# EAGLE board RJ12_UNO_shield (EAGLE 7.4.0)
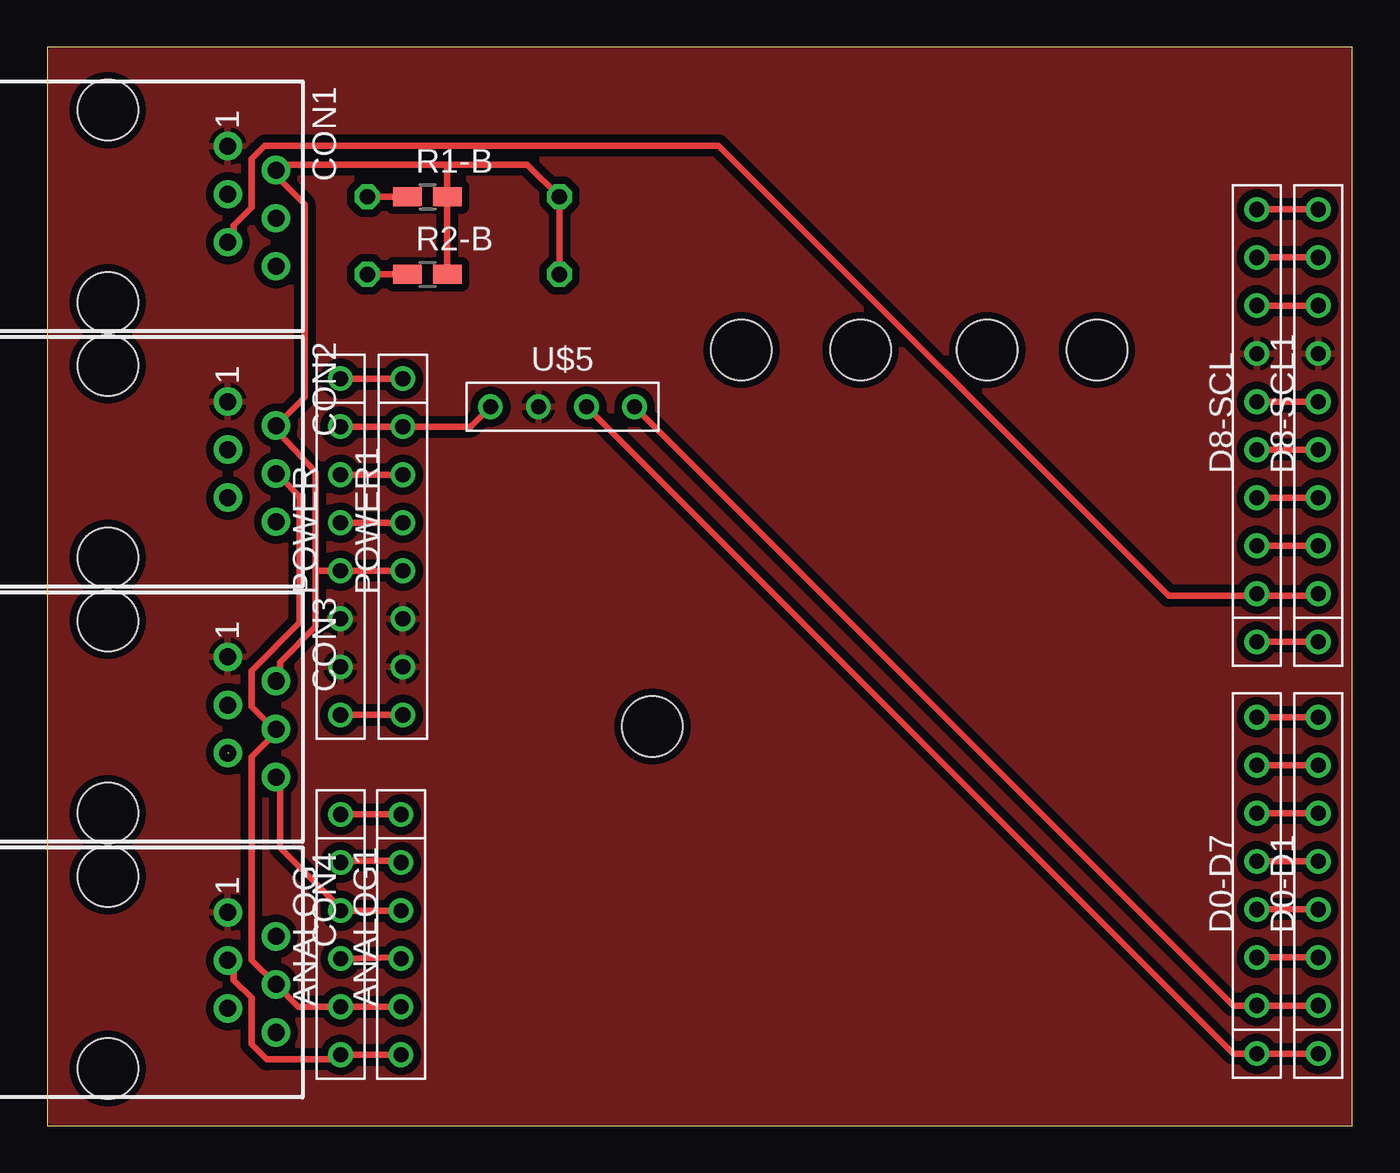
[diagram p0: board, top side]
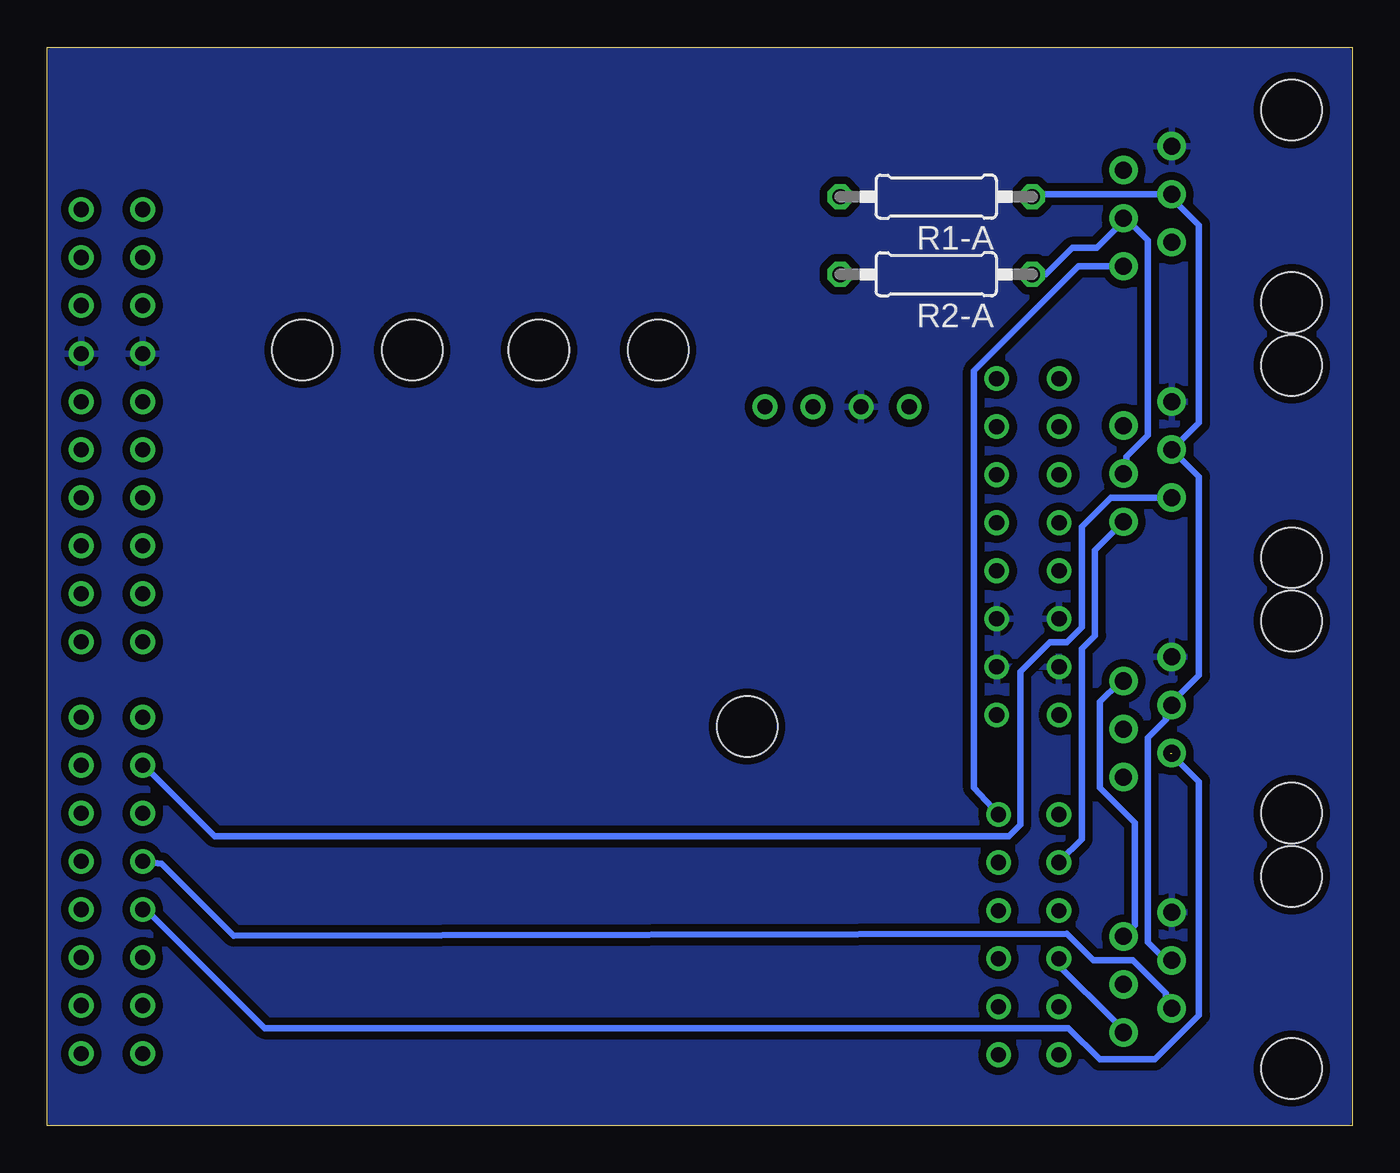
[diagram p1: board, bottom side, seen from below]

Size 69 x 57 mm. Coordinates in mm from the lower left corner, seen from the top.
Outline: 0,0 69,0 69,57 0,57 0,0
Copper layers (1*16): Top 0.035mm / dielectric 1.5mm / Bottom 0.035mm
Design rules "default *": minimum track width 10mil, minimum drill 24mil, track to track 12mil, track to pad 12mil, pad to pad 12mil, via to via 12mil, smd to smd 12mil, copper to edge 0mil, drill to drill 8mil, minimum pad ring 10mil, minimum via ring 8mil, stop-mask expansion 4mil, vias tented up to drill 0mil, thermal gap 10mil
Holes 3.2 mm at 32,21.1 55.5,41 49.7,41 43,41 36.7,41

## Footprints (pad centres in the part's own frame; a part is rotated, then mirrored left to right if it is on the bottom)
ANALOG = drill 0.8: A0 0,6.35; A1 0,3.81; A2 0,1.27; A3 0,-1.27; A4 0,-3.81; A5 0,-6.35
RJ12 = drill 0.9 pad 1.5: 1 -3.175,6.35; 2 -1.905,8.89; 3 -0.635,6.35; 4 0.635,8.89; 5 1.905,6.35; 6 3.175,8.89 | hole 3.2: -5.08,0; 5.08,0
DIGITAL0-7 = drill 0.8: D0 0,-8.89; D1 0,-6.35; D2 0,-3.81; D3 0,-1.27; D4 0,1.27; D5 0,3.81; D6 0,6.35; D7 0,8.89
DIGITAL8-SCL = drill 0.8: AREF 0,6.35; D8 0,-11.43; D9 0,-8.89; D10 0,-6.35; D11 0,-3.81; D12 0,-1.27; D13 0,1.27; GND 0,3.81; SCL 0,11.43; SDA 0,8.89
POWER = drill 0.8: 3V3 0,1.27; 5V(1) 0,6.35; 5V(2) 0,-1.27; GBD(2) 0,-6.35; GND(1) 0,-3.81; NC 0,8.89; RES 0,3.81; VIN 0,-8.89
0207/10 = drill 0.813 octagon: 1 -5.08,0; 2 5.08,0
R0805W = smd 1.5 x 1: 1 -1.052,0; 2 1.052,0
BLUETOOTH = drill 0.8: 5V 0,-3.81; GND 0,-1.27; RX 0,3.81; TX 0,1.27

## Placement (x,y rotation side)
ANALOG  ANALOG  [ANALOG]  15.51,10.1 0 top
ANALOG1  ANALOG  [ANALOG]  18.7,10.1 0 top
CON1  RJ12  [RJ12]  3.2,48.6 270 top
CON2  RJ12  [RJ12]  3.2,35.1 270 top
CON3  RJ12  [RJ12]  3.2,21.6 270 top
CON4  RJ12  [RJ12]  3.2,8.1 270 top
D0-D1  DIGITAL0-7  [DIGITAL0-7]  67.2,12.7 0 top
D0-D7  DIGITAL0-7  [DIGITAL0-7]  63.96,12.7 0 top
D8-SCL  DIGITAL8-SCL  [DIGITAL8-SCL]  63.96,37 0 top
D8-SCL1  DIGITAL8-SCL  [DIGITAL8-SCL]  67.2,37 0 top
POWER  POWER  [POWER]  15.5,30.6 0 top
POWER1  POWER  [POWER]  18.8,30.6 0 top
R1-A  [0207/10]  22,49.1 180 bottom
R1-B  [R0805W]  20.1,49.1 0 top
R2-A  [0207/10]  22,45 180 bottom
R2-B  [R0805W]  20.1,45 0 top
U$5  BLUETOOTH  [BLUETOOTH]  27.24,38 270 top

## Library data of the parts
ANALOG ANALOG1 CON1-CON4 D0-D1 D0-D7 D8-SCL D8-SCL1 POWER POWER1 U$5 = AtoG
R1-A R1-B R2-A R2-B = resistor

## Nets
GND: CON1.1 CON2.1 CON3.1 CON4.1 D8-SCL1.GND D8-SCL.GND POWER1.GBD(2) POWER1.GND(1) POWER.GBD(2) POWER.GND(1) U$5.GND
N$1: ANALOG1.A5 ANALOG.A5 CON1.3 CON2.3 CON3.3 CON4.3 R1-A.1 R1-B.1
N$2: ANALOG1.A4 ANALOG.A4 CON1.4 CON2.4 CON3.4 CON4.4 R2-A.1 R2-B.1
N$3: CON2.5 D0-D1.D6 D0-D7.D6
N$4: ANALOG1.A2 ANALOG.A2 CON3.6
N$5: ANALOG1.A1 ANALOG.A1 CON2.6
N$6: ANALOG1.A0 ANALOG.A0 CON1.6
N$7: POWER1.NC POWER.NC
N$8: POWER1.RES POWER.RES
N$9: POWER1.3V3 POWER.3V3
N$11: POWER1.VIN POWER.VIN
N$12: D8-SCL1.SCL D8-SCL.SCL
N$13: POWER1.5V(1) POWER.5V(1) U$5.5V
N$14: D8-SCL1.SDA D8-SCL.SDA
N$15: D0-D1.D0 D0-D7.D0 U$5.TX
N$16: D0-D1.D1 D0-D7.D1 U$5.RX
N$17: D8-SCL1.AREF D8-SCL.AREF
N$18: CON4.5 D0-D1.D4 D0-D7.D4
N$19: D8-SCL1.D13 D8-SCL.D13
N$20: CON3.5 D0-D1.D3 D0-D7.D3
N$22: D8-SCL1.D12 D8-SCL.D12
N$23: D8-SCL1.D11 D8-SCL.D11
N$24: CON1.5 D8-SCL1.D9 D8-SCL.D9
N$25: D8-SCL1.D10 D8-SCL.D10
N$26: D8-SCL1.D8 D8-SCL.D8
N$27: D0-D1.D7 D0-D7.D7
N$29: D0-D1.D2 D0-D7.D2
N$30: ANALOG1.A3 ANALOG.A3 CON4.6
N$31: CON1.2 CON2.2 CON3.2 CON4.2 POWER1.5V(2) POWER.5V(2) R1-A.2 R1-B.2 R2-A.2 R2-B.2
N$33: D0-D1.D5 D0-D7.D5

## Tracks (layer width: path | path; a pad name or v marks a point on that pad's centre or on a via)
GND
  pour Top (isolate 0.406): 0.2,56.8 0.2,0.2 68.8,0.2 68.8,56.8
  pour Bottom (isolate 0.406): 0.2,56.8 0.2,0.2 68.8,0.2 68.8,56.8
  pour Top: 1.6,10.7 1.6,5.3 7.3,5.2 7.3,10.6
  pour Top: 1.2,24.4 1.2,19 6.9,18.9 6.9,24.3
  pour Top: 1.4,37.8 1.4,32.4 7.1,32.3 7.1,37.7
  pour Top: 1.3,51.4 1.3,46 7,45.9 7,51.3
N$1
  Top 0.35: ANALOG1.A5 ANALOG.A5 15.45,3.5 11.6,3.5 10.8,4.3 10.8,6.75 9.85,7.7 9.85,8.4 CON4.3 | R1-B.1 R1-A.1
  Bottom 0.35: CON4.3 9.85,8.75 10.8,9.7 10.8,20.5 9.85,21.45 9.85,22.05 CON3.3 9.5,22.4 8.1,23.8 8.1,34.3 9.5,35.7 CON2.3 9.5,35.75 8.1,37.15 8.1,47.6 9.5,49 CON1.3 16.68,49.23 R1-A.1
N$2
  Top 0.35: ANALOG1.A4 ANALOG.A4 13.27,6.29 CON4.4 10.8,8.76 10.8,19.5 11.95,20.65 CON3.4 11.95,21 10.8,22.15 10.8,24.05 13.35,26.6 13.35,33.25 12.3,34.3 CON2.4 | R2-B.1 R2-A.1
  Bottom 0.35: CON2.4 11.95,34.65 11.95,35.35 10.8,36.5 10.8,46.8 11.95,47.95 CON1.4 12.15,47.9 12.15,47.74 13.5,46.4 14.8,46.4 16.2,45 R2-A.1
N$3
  Top 0.35: D0-D1.D6 D0-D7.D6
  Bottom 0.35: CON2.5 9.95,33.2 12.75,33.2 14.3,31.65 14.3,26.35 15.1,25.55 16,25.55 17.55,24 17.55,15.9 18.15,15.3 60.15,15.3 63.75,18.9 D0-D7.D6
N$4
  Top 0.35: ANALOG1.A2 ANALOG.A2 15.45,11.55 12.3,14.7 12.3,18.2 CON3.6
N$5
  Top 0.35: ANALOG.A1 15.8,14 18.6,14 ANALOG1.A1
  Bottom 0.35: ANALOG.A1 15.45,14 14.3,15.15 14.3,25.2 13.6,25.9 13.6,30.41 CON2.6
N$6
  Top 0.35: ANALOG.A0 ANALOG1.A0
  Bottom 0.35: ANALOG1.A0 20,17.85 20,39.9 14.47,45.42 CON1.6
N$7
  Top 0.35: POWER.NC POWER1.NC
N$8
  Top 0.35: POWER1.RES POWER.RES
N$9
  Top 0.35: POWER1.3V3 POWER.3V3
N$11
  Top 0.35: POWER.VIN POWER1.VIN
N$12
  Top 0.35: D8-SCL1.SCL D8-SCL.SCL
N$13
  Top 0.35: POWER.5V(1) POWER1.5V(1) 22.38,36.95 U$5.5V
N$14
  Top 0.35: D8-SCL1.SDA D8-SCL.SDA
N$15
  Top 0.35: D0-D1.D0 D0-D7.D0 62.7,3.81 U$5.TX
N$16
  Top 0.35: D0-D1.D1 D0-D7.D1 62.7,6.35 U$5.RX
N$17
  Top 0.35: D8-SCL1.AREF D8-SCL.AREF
N$18
  Top 0.35: D0-D1.D4 D0-D7.D4
  Bottom 0.35: CON4.5 9.85,6.3 9.85,7 11.6,8.75 13.7,8.75 15.1,10.15 59.15,10.05 62.95,13.85 D0-D7.D4
N$19
  Top 0.35: D8-SCL1.D13 D8-SCL.D13
N$20  (1 unrouted)
  Top 0.35: D0-D1.D3 D0-D7.D3
  Bottom 0.35: D0-D7.D3 63.55,11.2 57.5,5.15 15,5.15 13.35,3.5 10.45,3.5 8.1,5.85 8.1,18.19 9.61,19.7
N$22
  Top 0.35: D8-SCL1.D12 D8-SCL.D12
N$23
  Top 0.35: D8-SCL1.D11 D8-SCL.D11
N$24
  Top 0.35: D8-SCL1.D9 66.9,28 64.1,28 D8-SCL.D9 63.75,28 59.3,28 35.5,51.8 11.5,51.8 10.8,51.1 10.8,48.55 9.85,47.6 9.85,46.9 CON1.5
N$25
  Top 0.35: D8-SCL1.D10 D8-SCL.D10
N$26
  Top 0.35: D8-SCL1.D8 D8-SCL.D8
N$27
  Top 0.35: D0-D1.D7 D0-D7.D7
N$29
  Top 0.35: D0-D1.D2 D0-D7.D2
N$30
  Top 0.35: ANALOG1.A3 18.66,8.89 ANALOG.A3
  Bottom 0.35: CON4.6 12.3,5.25 15.8,8.75 ANALOG.A3
N$31
  Top 0.35: 14.2,29.3 14.2,26.4 12.3,24.5 12.3,23.8 CON3.2 | 14.2,29.3 14.2,34.55 12.3,36.55 12.3,36.75 CON2.2 13.6,38.52 13.6,48.7 12.09,50.21 CON1.2 12.38,50.8 21.2,50.8 | POWER1.5V(2) POWER.5V(2) 14.43,29.33 14.2,29.3 | R2-A.2 R1-A.2 25.38,50.8 21.2,50.8 | R2-B.2 R1-B.2 21.15,50.75 21.2,50.8
  Bottom 0.35: CON3.2 12.3,23.45 13.35,22.4 13.35,17.85 11.5,16 11.5,10.6 CON4.2
N$33
  Top 0.35: D0-D1.D5 D0-D7.D5

## Text on the board
tRestrict: 1 | 2 | 3 | 4